# Altium PCB AMA4B_Core_board.PcbDoc (part 1 of 3)
Units mm, origin at the board's own origin, x right, y up, seen from the top; angles counter-clockwise.
Board outline 16 x 22 mm, 4 copper layers (TOP, LY2 - GND, LY3 - GND, BOTTOM), stack 0.771 mm thick; 43 components, 117 nets, 318 pads, 236 vias.
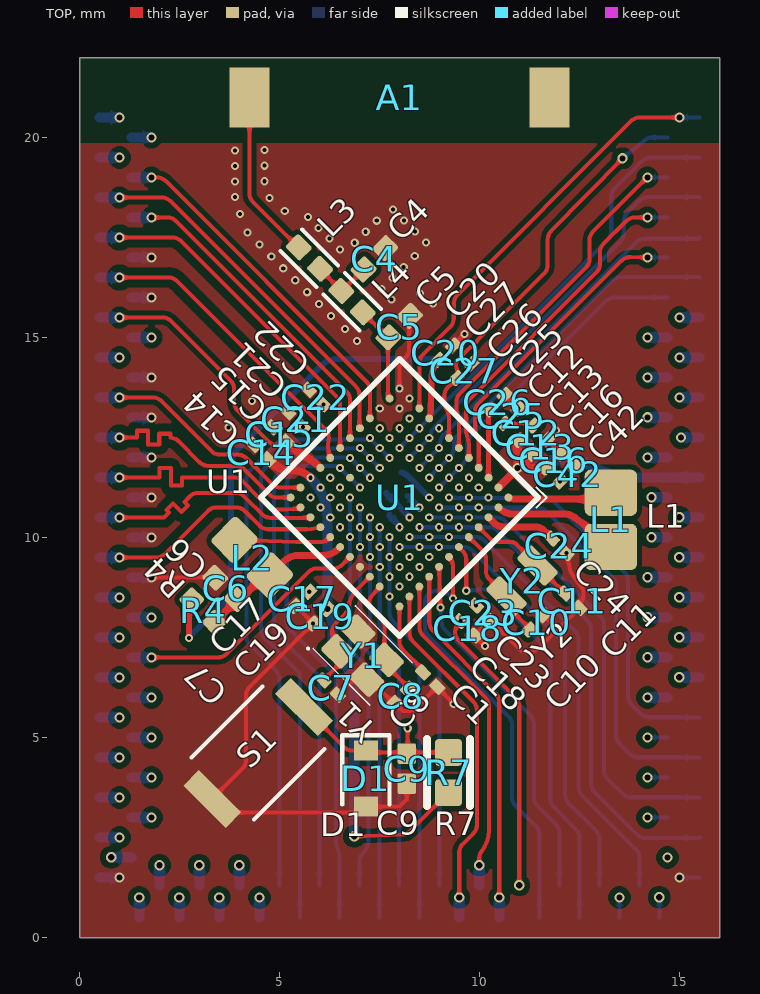
[diagram p0: TOP view]
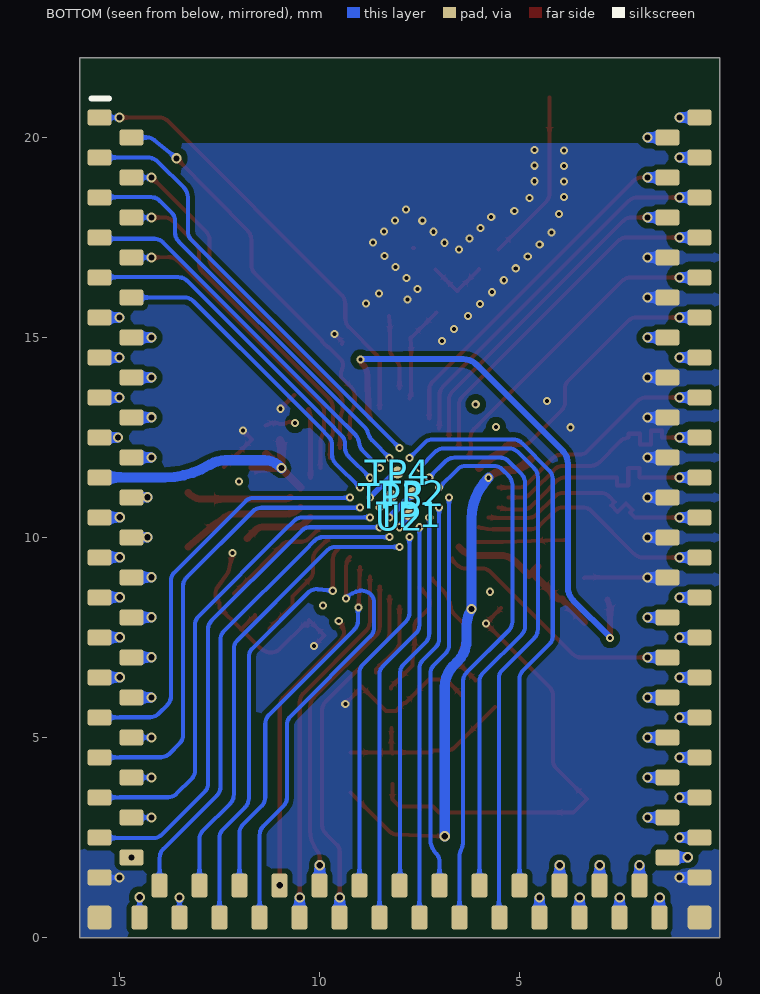
[diagram p1: BOTTOM view, seen from below]
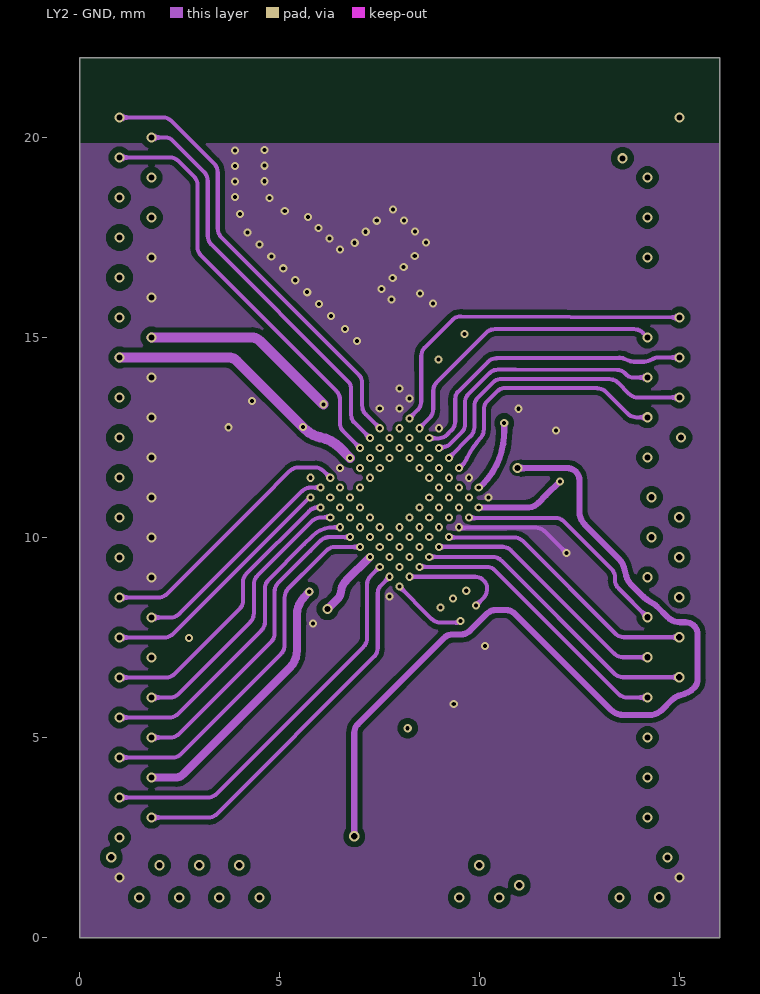
[diagram p2: LY2 - GND]
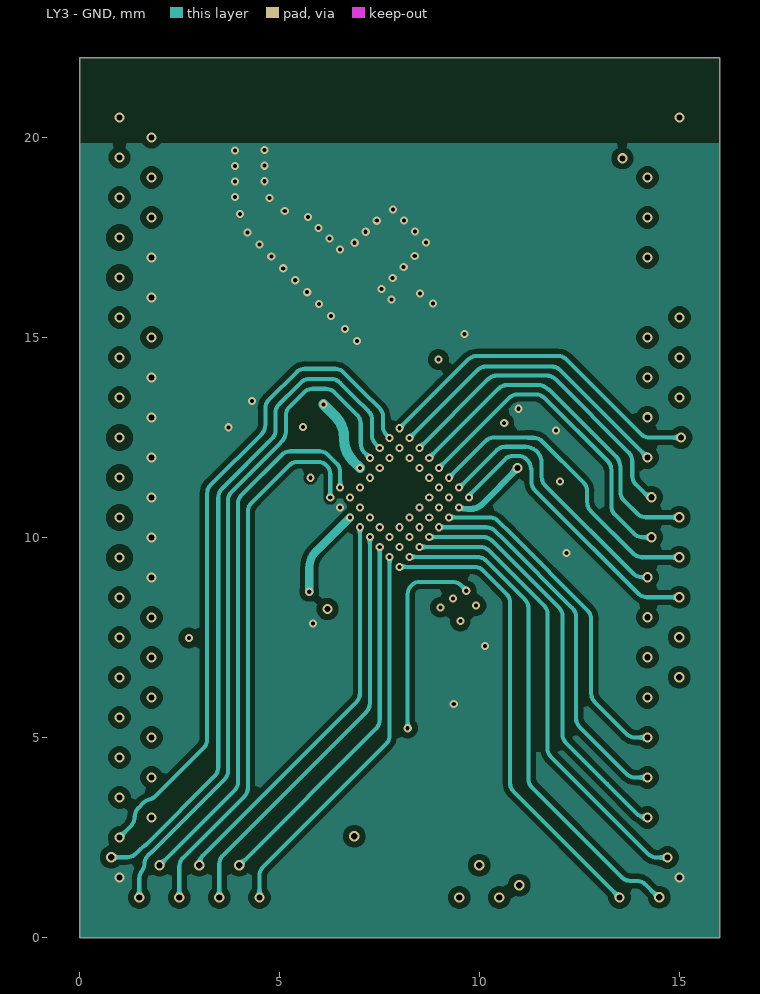
[diagram p3: LY3 - GND]

## Layer stack, top to bottom
Top Solder: solder mask 0.0432, Solder Resist, Dk 3.5
TOP: signal copper 0.035
Dielectric 2: prepreg 0.2104, PP-022, Dk 4.5
LY2 - GND: signal copper 0.0152
Dielectric2: core 0.25, Core-028, Dk 4.3
LY3 - GND: signal copper 0.0152
Dielectric 3: prepreg 0.2104, PP-022, Dk 4.5
BOTTOM: signal copper 0.035
Bottom Solder: solder mask 0.0432, Solder Resist, Dk 3.5

## Board outline
16,0 0,0 0,22 16,22

## Design rules (kind name [scope] priority, off if disabled: settings)
Clearance DIFFPAIR_CLEARANCE [InAnyDifferentialPair] p1: gap=0.127 ignorepadtopadclearanceinfootprint=TRUE except(0.152: Arc-Hole Track-Hole; 0.203: Arc-Poly Track-Poly SMDPad-Poly THPad-Poly Via-Poly Fill-Poly Poly-Poly)
Clearance APOLLOBGA_CLEARANCE [WithinRoom('ApolloBGA')] p2: gap=0.076 ignorepadtopadclearanceinfootprint=TRUE except(0.122: Arc-Fill Arc-Poly Arc-Region Track-Fill Track-Poly Track-Region; 0.127: Arc-THPad Arc-Hole Track-THPad Track-Hole)
Clearance [All] p3: gap=0.127 ignorepadtopadclearanceinfootprint=FALSE except(0.076: Arc-Fill Arc-Region Arc-Text Track-Text SMDPad-THPad SMDPad-Via SMDPad-Text THPad-THPad THPad-Via THPad-Text Via-Text Fill-Text Poly-Text Region-Text Text-Text Text-Hole; 0.152: Arc-Via Track-Via; 0.203: Arc-THPad Arc-Hole Track-THPad Track-Hole SMDPad-Hole THPad-Hole Via-Hole Fill-Hole Poly-Hole Region-Hole)
ComponentClearance [All] p1: gap=0 collisioncheckmode=3 verticalgap=0.254 showdistances=FALSE
DiffPairsRouting "Schematic Differential Pairs Routing" [InDifferentialPairClass('AP_USB')] p1: maxlimit=0.178 minlimit=0.127 mostfreqgap=0.152 toplayer_minwidth=0.076 toplayer_maxwidth=0.127 toplayer_prefwidth=0.102 midlayer1_minwidth=0.076 midlayer1_maxwidth=0.127 midlayer1_prefwidth=0.102 midlayer6_minwidth=0.076 midlayer6_maxwidth=0.127 midlayer6_prefwidth=0.102 bottomlayer_minwidth=0.076 bottomlayer_maxwidth=0.127 bottomlayer_prefwidth=0.102 maxuncoupledlength=12.7
FanoutControl Fanout_BGA [IsBGA] p1: bgadir=Out bgaviamode=Centered fanoutstyle=UnderPads fanoutdirection=Alternating viagrid=0.025 // Fanout_BGA (Default Rule)
HoleSize BlindViaHoleSize [InDrillLayerPair('TOP - LY4 - GND') OR InDrillLayerPair('TOP - LY3 - SIG') OR InDrillLayerPair('TOP - LY2 - GND') OR InDrillLayerPair('LY7 - GND - BOTTOM') OR InDrillLayerPair('LY6 - SIG - BOTTOM')] p1: absolutevalues=TRUE maxlimit=2.54 minlimit=0.1 maxpercent=80.000 minpercent=20.000
HoleSize [All] p2: absolutevalues=TRUE maxlimit=3.835 minlimit=0.076 maxpercent=80.000 minpercent=20.000
HoleToHoleClearance HoleToHoleClearance_1 [WithinRoom('ApolloBGA') OR WithinRoom('JLINKOB')] p1: gap=0.102 allowstackedmicrovias=TRUE
HoleToHoleClearance [All] p2: gap=0.254 allowstackedmicrovias=TRUE
MatchedLengths "Schematic Matched Net Lengths_8" [InDifferentialPairClass('MIPI_CLK')] p1: tolerance=2.54 checknetsindiffpair=FALSE checkdiffpairvsdiffpair=TRUE checkxsignals=TRUE checkothers=TRUE
MatchedLengths "Schematic Matched Net Lengths_5" [InDifferentialPairClass('MIPI_D0')] p2: tolerance=2.54 checknetsindiffpair=FALSE checkdiffpairvsdiffpair=TRUE checkxsignals=TRUE checkothers=TRUE
MatchedLengths "Schematic Matched Net Lengths_3" [InDifferentialPairClass('AP_USB')] p3: tolerance=2.54 checknetsindiffpair=FALSE checkdiffpairvsdiffpair=TRUE checkxsignals=TRUE checkothers=TRUE
MaxMinImpedance "Schematic Impedance Constraint_5" [InDifferentialPairClass('MIPI_D0')] p1: minimum=95.00 maximum=105.0
MaxMinImpedance "Schematic Impedance Constraint_4" [InDifferentialPairClass('MIPI_CLK')] p2: minimum=95.00 maximum=105.0
MaxMinImpedance "Schematic Impedance Constraint_1" [InDifferentialPairClass('AP_USB')] p3: minimum=85.00 maximum=95.00
MinimumSolderMaskSliver APOLLOBGA_MinimumSolderMaskSliver [WithinRoom('ApolloBGA') vs HasFootprint('bga131_0p35_4p7x4p7')] p1: minsoldermaskwidth=0.025
MinimumSolderMaskSliver [All] p2: minsoldermaskwidth=0.025
PlaneConnect [All] p1: planeconnectstyle=Direct reliefexpansion=0.508 reliefentries=4 reliefconductorwidth=0.254 reliefairgap=0.254
PolygonConnect [All] p1: thpad.connectstyle=Relief thpad.reliefconductorwidth=0.254 thpad.reliefentries=4 thpad.polygonreliefangle="90 Angle" thpad.airgapwidth=0.254 smdpad.connectstyle=Direct smdpad.reliefconductorwidth=0.254 smdpad.reliefentries=4 smdpad.polygonreliefangle="90 Angle" smdpad.airgapwidth=0.127 via.connectstyle=Direct via.reliefconductorwidth=0.254 via.reliefentries=4 via.polygonreliefangle="90 Angle" via.airgapwidth=0.254
RoomDefinition ApolloBGA [InComponentClass('ApolloBGA')] p1: confinementstyle=ConfineIn formatcopy=TRUE lockcomponents=FALSE outline 8.07,7.357 4.427,11 8.07,14.643 11.712,11
RoutingVias [All] p1: holewidth=0.102 width=0.203 viastyle="Through Hole" minholewidth=0.076 minwidth=0.152 maxholewidth=0.635 maxwidth=1.27
RoutingVias APOLLOBGA_RoutingVias [WithinRoom('ApolloBGA')] p2: holewidth=0.102 width=0.203 viastyle="Through Hole" minholewidth=0.076 minwidth=0.152 maxholewidth=0.635 maxwidth=1.27
SilkToSilkClearance [All] p1: silktosilkclearance=0
SilkToSolderMaskClearance [IsPad] p1: minsilkscreentomaskgap=0 clearancetoexposedcopper=FALSE
SolderMaskExpansion [All] p1: expansion=0.05 istentingtop=FALSE
UnRoutedNet [All] p1: checkbadconnections=TRUE
ViasUnderSMD [All] p1: allowed=TRUE
Width [All] p1: maxlimit=1.27 minlimit=0.076 preferedwidth=0.152 midlayer1_maxwidth=0.508 midlayer6_maxwidth=0.508 bottomlayer_maxwidth=0.508 minimp=50.000000 maximp=50.000000 favimp=50.000000
Width APOLLOBGA_WIDTH [WithinRoom('ApolloBGA')] p2: maxlimit=0.508 minlimit=0.076 preferedwidth=0.102 midlayer1_prefwidth=0.089 midlayer6_prefwidth=0.089 minimp=50.000000 maximp=50.000000 favimp=50.000000
20 further rules are at their usual default settings.

## Classes and differential pairs
net class MIPI: MIPI_CLK.MIPI_N MIPI_CLK.MIPI_P MIPI_D0.MIPI_N MIPI_D0.MIPI_P
component class GPIO: TP1 TP2 TP3 TP4 U2
differential pair class MIPI_D0: MIPI_D0.MIPI
differential pair class MIPI_CLK: MIPI_CLK.MIPI
differential pair class AP_USB: AP4_USB
component class Apollo4B: A1 C1 C4 C5 C6 C7 C8 C9 C10 C11 C12 C13 C14 C15 C16 C17 C18 C19 C20 C21 C22 C23 C24 C25 C26 C27 C42 D1 L1 L2 L3 L4 R4 R7 S1 U1 Y1 Y2
differential pair MIPI_D0.MIPI: +MIPI_D0.MIPI_P -MIPI_D0.MIPI_N
differential pair MIPI_CLK.MIPI: +MIPI_CLK.MIPI_P -MIPI_CLK.MIPI_N
differential pair AP4_USB: +AP4_USB_P -AP4_USB_N

## Components (designator, comment, footprint, x,y, rotation, side; value= is the part's Value field where it differs from the comment)
A1 "MIFA Antenna" ANT-2.4GHZ-8.0X1.0MM 8,21 r0 top
C1 "100nF" IPC_B 8.765,6.45 r315 top
C4 "1.5pF" IPC_C_2 7.371,16.969 r45 top
C5 "2pF" IPC_C_2 7.993,15.272 r45 top
C6 "4.7uF" IPC_C_2 3.66,8.726 r135 top
C7 "4pF" IPC_C#1 6.279,6.249 r315 top
C8 "4pF" IPC_C#1 8.031,6.043 r225 top
C9 "4.7nF" IPC_C#2 8.18,4.22 r270 top
C10 "6pF" IPC_C#1 11.428,7.879 r45 top
C11 "6pF" IPC_C#1 12.316,8.422 r315 top
C12 "2.2uF" IPC_C#1 11.168,12.618 r45 top
C13 "1uF" IPC_C#1 11.513,12.272 r45 top
C14 "1uF" IPC_C#1 4.538,12.138 r135 top
C15 "1uF" IPC_C#1 5.001,12.576 r135 top
C16 "1uF" IPC_C#1 11.858,11.927 r45 top
C17 "2.2uF" IPC_C#1 5.563,8.464 r225 top
C18 "2.2uF" IPC_C#1 9.7,7.731 r315 top
C19 "2.2uF" IPC_C#1 6.021,8.032 r225 top
C20 "1uF" IPC_C#1 9.16,14.622 r45 top
C21 "2.2uF" IPC_C#1 5.4,12.953 r135 top
C22 "2.2uF" IPC_C#1 5.909,13.513 r135 top
C23 "2.2uF" IPC_C#1 10.088,8.12 r315 top
C24 "2.2uF" IPC_C#1 11.992,9.792 r315 top
C25 "2.2uF" IPC_C#1 10.797,13.039 r45 top
C26 "2.2uF" IPC_C#1 10.452,13.384 r45 top
C27 "2.2uF" IPC_C#1 9.616,14.166 r45 top
C42 "2.2uF" IPC_C#1 12.204,11.582 r45 top
D1 "PESD5V0X1UB,135" SC79 7.16,3.973 r270 top
L1 "2.2uH" IPC_C#3 13.283,10.442 r270 top
L2 "1uH" IPC_B_2 4.319,9.497 r45 top
L3 "2.2nH" IPC_C_4 5.747,16.985 r315 top
L4 "2nH" IPC_C_4 6.813,15.896 r315 top
R4 "0 Ω" IPC_C#4 3.089,8.165 r315 top
R7 "100kΩ" IPC_A 9.225,4.125 r270 top
S1 "TS2306A-240GF-MSM-9_C388290" TS2306A240GFMSM9_C388290 4.465,4.611 r225 top
TP1 "PAD" TPPAD_0.5MM 7.752,10.573 r90 bottom
TP2 "PAD" TPPAD_0.5MM 7.666,11.109 r90 bottom
TP3 "PAD" TPPAD_0.5mm 8.204,11.038 r90 bottom
TP4 "PAD" TPPAD_0.5mm 8.05,11.624 r90 bottom
U1 "APOLLO4BPKBR" BGA131_0P35_4P7X4P7 8,11 r225 top locked
U2 "AMAP42KP-KBR" APOLLO_4B 8,10.5 r180 bottom locked
Y1 "32MHz" XOSC_ABM12W_1.2X1.6 7.076,7.05 r135 top
Y2 "32.768kHz" XTAL2-1P6X1P0-SM 11.064,8.915 r45 top

## Footprints (in the part's own frame and the unit in brackets; to place one, negate y for a bottom-side part, rotate by r counter-clockwise, add the part's x,y. Pads: shape width x height; smd on the part's side, far side on the other; paste and mask are expansions set on the pad)
ANT-2.4GHZ-8.0X1.0MM [mm] "ANT-2.4GHZ-8.0X1.0MM"
  rect 1x1.5 smd: 1(-3.75,0) NC(3.75,0)
  body extent -4.85,-1 4.65,1.1, height 1
APOLLO_4B [mm]
  rrect30% 0.6x0.4 smd: 0(-7.5,10) 1(-6.7,9.5) 2(-7.5,9) 3(-6.7,8.5) 4(-7.5,8) 5(-6.7,7.5) 6(-7.5,7) 7(-6.7,6.5) 8(-7.5,6) 9(-6.7,5.5) 10(-7.5,5) 11(-6.7,4.5) 12(-7.5,4) 13(-6.7,3.5) 14(-7.5,3) 15(-6.7,2.5) 16(-7.5,2) 17(-6.7,1.5) 18(-7.5,1) 19(-6.7,0.5) 20(-7.5,0) 21(-6.7,-0.5) 22(-7.5,-1) 23(-6.7,-1.5) 24(-7.5,-2) 25(-6.7,-2.5) 26(-7.5,-3) 27(-6.7,-3.5) 28(-7.5,-4) 29(-6.7,-4.5) 30(-7.5,-5) 31(-6.7,-5.5) 32(-7.5,-6) 33(-6.7,-6.5) 34(-7.5,-7) 35(-6.7,-7.5) 36(-7.5,-8) 37(-6.7,-8.5) 38(-7.5,-9) 68(7.5,-9) 69(6.7,-8.5) 70(7.5,-8) 71(6.7,-7.5) 72(7.5,-7) 73(6.7,-6.5) 74(7.5,-6) 75(6.7,-5.5) 76(7.5,-5) 77(6.7,-4.5) 78(7.5,-4) 79(6.7,-3.5) 80(7.5,-3) 81(6.7,-2.5) 82(7.5,-2) 83(6.7,-1.5) 84(7.5,-1) 85(6.7,-0.5) 86(7.5,0) 87(6.7,0.5) 88(7.5,1) 89(6.7,1.5) 90(7.5,2) 91(6.7,2.5) 92(7.5,3) 93(6.7,3.5) 94(7.5,4) 95(6.7,4.5) 96(7.5,5) 97(6.7,5.5) 98(7.5,6) 99(6.7,6.5) 100(7.5,7) 101(6.7,7.5) 102(7.5,8) 103(6.7,8.5) 104(7.5,9) 105(6.7,9.5) 106(7.5,10)
  rrect30% 0.6x0.6 smd: 39(-7.5,-10) 67(7.5,-10)
  rrect30% 0.4x0.6 smd: 40(-6.5,-10) 41(-6,-9.2) 42(-5.5,-10) 43(-5,-9.2) 44(-4.5,-10) 45(-4,-9.2) 46(-3.5,-10) 47(-3,-9.2) 48(-2.5,-10) 49(-2,-9.2) 50(-1.5,-10) 51(-1,-9.2) 52(-0.5,-10) 53(0,-9.2) 54(0.5,-10) 55(1,-9.2) 56(1.5,-10) 57(2,-9.2) 58(2.5,-10) 59(3,-9.2) 60(3.5,-10) 61(4,-9.2) 62(4.5,-10) 63(5,-9.2) 64(5.5,-10) 65(6,-9.2) 66(6.5,-10)
BGA131_0P35_4P7X4P7 [mm] "BGA131_0P35_4P7X4P7"
  round 0.2 smd mask+0.03: A1(-1.925,1.925) A2(-1.575,1.925) A3(-1.225,1.925) A4(-0.875,1.925) A5(-0.525,1.925) A6(-0.175,1.925) A7(0.175,1.925) A8(0.525,1.925) A9(0.875,1.925) A10(1.225,1.925) A11(1.575,1.925) A12(1.925,1.925) B1(-1.925,1.575) B2(-1.575,1.575) B3(-1.225,1.575) B4(-0.875,1.575) B5(-0.525,1.575) B6(-0.175,1.575) B7(0.175,1.575) B8(0.525,1.575) B9(0.875,1.575) B10(1.225,1.575) B11(1.575,1.575) B12(1.925,1.575) C1(-1.925,1.225) C2(-1.575,1.225) C3(-1.225,1.225) C4(-0.875,1.225) C5(-0.525,1.225) C6(-0.175,1.225) C7(0.175,1.225) C8(0.525,1.225) C9(0.875,1.225) C10(1.225,1.225) C11(1.575,1.225) C12(1.925,1.225) D1(-1.925,0.875) D2(-1.575,0.875) D3(-1.225,0.875) D4(-0.875,0.875) D5(-0.525,0.875) D6(-0.175,0.875) D7(0.175,0.875) D8(0.525,0.875) D9(0.875,0.875) D10(1.225,0.875) D11(1.575,0.875) D12(1.925,0.875) E1(-1.925,0.525) E2(-1.575,0.525) E3(-1.225,0.525) E4(-0.875,0.525) E5(-0.525,0.525) E6(-0.175,0.525) E7(0.175,0.525) E8(0.525,0.525) E9(0.875,0.525) E10(1.225,0.525) E11(1.575,0.525) E12(1.925,0.525) F1(-1.925,0.175) F2(-1.575,0.175) F3(-1.225,0.175) F4(-0.875,0.175) F9(0.875,0.175) F10(1.225,0.175) F11(1.575,0.175) F12(1.925,0.175) G1(-1.925,-0.175) G2(-1.575,-0.175) G3(-1.225,-0.175) G4(-0.875,-0.175) G9(0.875,-0.175) G10(1.225,-0.175) G11(1.575,-0.175) G12(1.925,-0.175) H1(-1.925,-0.525) H2(-1.575,-0.525) H3(-1.225,-0.525) H4(-0.875,-0.525) H9(0.875,-0.525) H10(1.225,-0.525) H11(1.575,-0.525) H12(1.925,-0.525) J1(-1.925,-0.875) J2(-1.575,-0.875) J3(-1.225,-0.875) J4(-0.875,-0.875) J5(-0.525,-0.875) J6(-0.175,-0.875) J7(0.175,-0.875) J8(0.525,-0.875) J9(0.875,-0.875) J10(1.225,-0.875) J11(1.575,-0.875) J12(1.925,-0.875) K1(-1.925,-1.225) K2(-1.575,-1.225) K3(-1.225,-1.225) K4(-0.875,-1.225) K5(-0.525,-1.225) K6(-0.175,-1.225) K7(0.175,-1.225) K8(0.525,-1.225) K9(0.875,-1.225) K10(1.225,-1.225) K11(1.575,-1.225) K12(1.925,-1.225) L1(-1.925,-1.575) L2(-1.575,-1.575) L4(-0.875,-1.575) L5(-0.525,-1.575) L6(-0.175,-1.575) L7(0.175,-1.575) L8(0.525,-1.575) L9(0.875,-1.575) L10(1.225,-1.575) L11(1.575,-1.575) L12(1.925,-1.575) M1(-1.925,-1.925) M2(-1.575,-1.925) M3(-1.225,-1.925) M4(-0.875,-1.925) M5(-0.525,-1.925) M6(-0.175,-1.925) M7(0.175,-1.925) M8(0.525,-1.925) M9(0.875,-1.925) M10(1.225,-1.925) M11(1.575,-1.925) M12(1.925,-1.925)
  silkscreen extent -2.6,-2.45 2.45,2.6, body extent -2.45,-2.45 2.45,2.45, height 0.5
IPC_A [mm]
  rrect25% 0.668x0.672 smd mask+0.051: 1(-0.502,0) 2(0.502,0)
  silkscreen extent -0.83,-0.54 0.84,0.54, body extent -0.53,-0.27 0.53,0.28, height 0.4
IPC_B [mm]
  rrect25% 0.354x0.263 smd mask+0.025: 1(-0.254,0) 2(0.254,0)
  body extent -0.31,-0.17 0.32,0.16, height 0.33
IPC_B_2 [mm]
  rrect25% 0.906x0.855 smd paste+0 mask+0: 1(0,0.626) 2(0,-0.626)
  body extent -0.6,-1.15 0.6,1.15, height 0.25
IPC_C#1 [mm]
  rrect25% 0.354x0.263 smd mask+0.025: 1(-0.254,0) 2(0.254,0)
  body extent -0.31,-0.17 0.32,0.16, height 0.33
IPC_C#2 [mm]
  rrect25% 0.515x0.472 smd mask+0.051: 1(-0.379,0) 2(0.379,0)
  body extent -0.74,-0.38 0.74,0.38, height 0.25
IPC_C#3 [mm]
  rrect25% 1.154x1.306 smd mask+0.051: 1(-0.676,0) 2(0.676,0)
  body extent -1.35,-0.8 1.35,0.8, height 0.25
IPC_C#4 [mm]
  rrect25% 0.468x0.472 smd mask+0.051: 1(-0.402,0) 2(0.402,0)
  body extent -0.53,-0.27 0.53,0.28, height 0.4
IPC_C_2 [mm]
  rrect25% 0.515x0.472 smd mask+0.051: 1(-0.379,0) 2(0.379,0)
  body extent -0.5,-0.25 0.5,0.25, height 0.55
IPC_C_4 [mm]
  rrect25% 0.515x0.472 smd paste+0 mask+0.05: 1(-0.379,0) 2(0.379,0)
  silkscreen extent -0.64,-0.38 0.64,0.38, body extent -0.74,-0.38 0.74,0.38, height 0.25
SC79 [mm] "SC79"
  rect 0.5x0.6 smd paste-0.05 mask+0.05: 1(-0.7,0) 2(0.7,0)
  silkscreen extent -1.08,-0.59 0.65,0.59
TPPAD_0.5MM [mm] "A 1.5mm Copper Pad Testpoint"
  round 0.3 smd paste-0.75: TP(0,0)
TPPAD_0.5mm [mm] "A 1.5mm Copper Pad Testpoint"
  round 0.3 smd paste-0.75: TP(0,0)
TS2306A240GFMSM9_C388290 [mm]
  rect 0.55x1.5 smd: 1(-1.625,0) 2(1.625,0)
  silkscreen extent -1.25,-1.1 1.25,1.1, body extent -1.84,-1.1 1.84,1.1, height 1.1
XOSC_ABM12W_1.2X1.6 [mm] "Footprint for the ABM12W series of Xtal oscilators"
  rrect25% 0.73x0.58 smd mask+0.03: 1(0.5,0.35) 2(-0.5,0.35) 3(-0.5,-0.35) 4(0.5,-0.35)
  silkscreen extent -1,-0.75 1.11,0.87, body extent -0.8,-0.6 0.8,0.6, height 0.4
XTAL2-1P6X1P0-SM [mm] "XTAL2-1P6X1P0-SM"
  rrect25% 0.5x1.001 smd: 1(-0.549,0) 2(0.549,0)
  body extent -0.8,-0.5 0.8,0.5, height 0.4

## Part data
A1: library part "Ceramic _ANTENNA", "None", AMBIQ PN=PCB_ANTENNA
C1: library part Capacitor, "NONE", Capacitance=2.2uF, Case Code (Imperial)=0201, Case Code (Metric)=0603, Dielectric=X5R, Manufacturer=Murata, Manufacturer Part Number=GRM033R61A225KE47D, Max Operating Temperature=85°C, Min Operating Temperature=-55°C, Tolerance=10%, Voltage Rating=10V, AMBIQ PN=GRM033R61A225KE47D, Case/Package=0201, Category="Ceramic Capacitors", ComponentLink1Description=http://search.murata.co.jp/Ceramy/image/img/A01X/G101/ENG/GRM033R61A225KE47-01.pdf?src-supplier=Digi-Key, ComponentLink1URL=http://search.murata.co.jp/Ceramy/image/img/A01X/G101/ENG/GRM033R61A225KE47-01.pdf?src-supplier=Digi-Key, Length=0.024inch, Mount="Surface Mount", Packaging="Tape and Reel", Pricing 1="1=0.27590, 10=0.23000, 25=0.18010, 100=0.10000, 250=0.09900, 500=0.06860, 1000=0.06790, 3000=0.06720, 6000=0.05140, 15000=0.050", RoHS=Yes, RoHS Compliant=Yes, Stock 1=990, Supplier 1="Arrow Electronics", Supplier Part Number 1=GRM033R61A225KE47D, Thickness=0.015inch, Voltage Rating (DC)=10V, Width=0.012inch
C4: library part Capacitor, "NONE", Case Code (Imperial)=0402, Case Code (Metric)=1005, Manufacturer=Murata, Manufacturer Part Number=GRM1555C1H1R5CA01D, AMBIQ PN=GRM1555C1H1R5CA01D, Capacitance=1.5pF, Case/Package=0402, Category="Ceramic Capacitors", Mount="Surface Mount", Mounting Technology="Surface Mount", Pricing 1="10000=0.00487, 20000=0.00476, 40000=0.00465 (USD)", RoHS=Yes, Stock 1=20000, Supplier 1=Avnet, Supplier Part Number 1=GRM1555C1H1R5CA01D
C5: library part Capacitor, "NONE", Case Code (Imperial)=0402, Case Code (Metric)=1005, Dielectric=C0G, Manufacturer=Murata, Manufacturer Part Number=GRM1555C1H2R0WA01D, Tolerance=1%, AMBIQ PN=GRM1555C1H2R0WA01D, Capacitance=2pF, Case/Package=0402, Category="Ceramic Capacitors", Mount="Surface Mount", Pricing 1="1=0.10000, 10=0.05720, 25=0.05660, 100=0.03540, 250=0.03000 (USD)", RoHS=Yes, Stock 1=54, Supplier 1="Arrow Electronics", Supplier Part Number 1=GRM1555C1H2R0WA01D
C6: library part Capacitor, "NONE", Case Code (Imperial)=0402, Case Code (Metric)=1005, Dielectric=X5R, Manufacturer=Murata, Manufacturer Part Number=GRM155R60G475ME87D, Max Operating Temperature=85°C, Min Operating Temperature=-55°C, Tolerance=20%, Voltage=4V, AMBIQ PN=GRM155R60G475ME87D, Capacitance=4.7uF, Case/Package=0402, Category="Ceramic Capacitors", ComponentLink1Description=https://datasheet.ciiva.com/11613/c02e-11613181.pdf?src-supplier=Avnet, ComponentLink1URL=https://datasheet.ciiva.com/11613/c02e-11613181.pdf?src-supplier=Avnet, Construction=Flat, Depth=0.5mm, Height=0.5mm, Lead Free="Lead Free", Length=1mm, Mount="Surface Mount", Packaging="Tape and Reel", Pricing 1="1=0.12440, 10=0.07530, 25=0.07460, 100=0.04310, 250=0.04270, 500=0.02940, 1000=0.02580, 3000=0.02370, 6000=0.02210, 15000=0.021", Radiation Hardening=No, REACH SVHC="No SVHC", RoHS=Yes, RoHS Compliant=Yes, Series=GRM, Stock 1=79890, Supplier 1="Arrow Electronics", Supplier Part Number 1=GRM155R60G475ME87D, Thickness=0.026inch, Voltage Rating=4V, Voltage Rating (DC)=4V, Width=0.02inch
C7 C8: library part Capacitor, "NONE", Case Code (Imperial)=0201, Case Code (Metric)=0603, Dielectric=C0G, Manufacturer=Murata, Manufacturer Part Number=GRM0335C1H4R0BA01D, Max Operating Temperature=125°C, Min Operating Temperature=-55°C, Package Quantity=15000, Voltage Rating=50V, AMBIQ PN=GRM0335C1H4R0BA01D, Capacitance=4pF, Case/Package=0201, Category="Ceramic Capacitors", ComponentLink1Description=http://www.mouser.com/ds/2/281/c02e-2905.pdf?src-supplier=Mouser, ComponentLink1URL=http://www.mouser.com/ds/2/281/c02e-2905.pdf?src-supplier=Mouser, Depth=0.3mm, Height=0.3mm, Length=0.6mm, Mount="Surface Mount", Packaging="Tape and Reel", Pricing 1="1=0.09680, 10=0.01620, 25=0.01560, 100=0.00890, 250=0.00860, 500=0.00620, 3000=0.00530 (USD)", RoHS=Yes, Series=GRM, Stock 1=3508, Supplier 1="Arrow Electronics", Supplier Part Number 1=GRM0335C1H4R0BA01D, Termination=SMD/SMT, Thickness=0.013inch, Voltage Rating (DC)=50V, Width=0.012inch
C9: library part Capacitor, "NONE", Case Code (Imperial)=0402, Case Code (Metric)=1005, Dielectric=X5R, Manufacturer=Murata, Manufacturer Part Number=GRM155R61C472KA01D, Max Operating Temperature=85°C, Min Operating Temperature=-55°C, Package Quantity=10000, Tolerance=10%, Voltage Rating=16V, AMBIQ PN=GRM155R61C472KA01D, Capacitance=4.7nF, Case/Package=0402, Category="Ceramic Capacitors", ComponentLink1Description=https://datasheet.ciiva.com/11620/product-11620403.pdf?src-supplier=Avnet, ComponentLink1URL=https://datasheet.ciiva.com/11620/product-11620403.pdf?src-supplier=Avnet, Construction=Flat, Depth=0.5mm, Height=0.5mm, Length=1mm, Mount="Surface Mount", Packaging="Tape and Reel", Pricing 1="1=0.07090 (USD)", Radiation Hardening=No, RoHS=Yes, RoHS Compliant=Yes, Series=GRM, Stock 1=3, Supplier 1="Arrow Electronics", Supplier Part Number 1=GRM155R61C472KA01D, Termination=SMD/SMT, Thickness=0.022inch, Voltage Rating (DC)=16V, Width=0.02inch
C10 C11: library part Capacitor, "NONE", Case Code (Imperial)=0201, Case Code (Metric)=0603, Dielectric=C0G, Manufacturer=Murata, Manufacturer Part Number=GRM0335C1H6R0BA01D, Max Operating Temperature=125°C, Min Operating Temperature=-55°C, Package Quantity=15000, Voltage Rating=50V, AMBIQ PN=GRM0335C1H6R0BA01D, Capacitance=6pF, Case/Package=0201, Category="Ceramic Capacitors", ComponentLink1Description=http://www.mouser.com/ds/2/281/c02e-2905.pdf?src-supplier=Mouser, ComponentLink1URL=http://www.mouser.com/ds/2/281/c02e-2905.pdf?src-supplier=Mouser, Height=0.3mm, Length=0.024inch, Mount="Surface Mount", Packaging="Tape and Reel", Pricing 1="1=0.06400, 10=0.01810, 25=0.01250, 100=0.00850, 250=0.00840, 500=0.00620, 1000=0.00510, 3000=0.00460 (USD)", RoHS=Yes, RoHS Compliant=Yes, Series=GRM, Stock 1=4052, Supplier 1="Arrow Electronics", Supplier Part Number 1=GRM0335C1H6R0BA01D, Termination=SMD/SMT, Thickness=0.013inch, Voltage Rating (DC)=50V, Width=0.012inch
C12 C17 C18 C19 C21 C22 C23 C24 C25 C26 C27 C42: library part Capacitor, "NONE", Case Code (Imperial)=0201, Case Code (Metric)=0603, Dielectric=X5R, Manufacturer=Murata, Manufacturer Part Number=GRM033R61A225KE47D, Max Operating Temperature=85°C, Min Operating Temperature=-55°C, Tolerance=10%, Voltage Rating=10V, AMBIQ PN=GRM033R61A225KE47D, Capacitance=2.2uF, Case/Package=0201, Category="Ceramic Capacitors", ComponentLink1Description=http://search.murata.co.jp/Ceramy/image/img/A01X/G101/ENG/GRM033R61A225KE47-01.pdf?src-supplier=Digi-Key, ComponentLink1URL=http://search.murata.co.jp/Ceramy/image/img/A01X/G101/ENG/GRM033R61A225KE47-01.pdf?src-supplier=Digi-Key, Length=0.024inch, Mount="Surface Mount", Packaging="Tape and Reel", Pricing 1="1=0.27590, 10=0.23000, 25=0.18010, 100=0.10000, 250=0.09900, 500=0.06860, 1000=0.06790, 3000=0.06720, 6000=0.05140, 15000=0.050", RoHS=Yes, RoHS Compliant=Yes, Stock 1=990, Supplier 1="Arrow Electronics", Supplier Part Number 1=GRM033R61A225KE47D, Thickness=0.015inch, Voltage Rating (DC)=10V, Width=0.012inch
C13 C14 C15 C16 C20: library part Capacitor, "NONE", Case Code (Imperial)=0201, Case Code (Metric)=0603, Dielectric=X5R, Manufacturer=Murata, Manufacturer Part Number=GRM033R61A105ME15D, Max Operating Temperature=85°C, Min Operating Temperature=-55°C, Tolerance=20%, Voltage Rating=10V, AMBIQ PN=GRM033R61A105ME15D, Capacitance=1uF, Case/Package=0201, Category="Ceramic Capacitors", ComponentLink1Description=http://search.murata.co.jp/Ceramy/image/img/A01X/G101/ENG/GRM033R61A105ME15-01.pdf?src-supplier=Digi-Key, ComponentLink1URL=http://search.murata.co.jp/Ceramy/image/img/A01X/G101/ENG/GRM033R61A105ME15-01.pdf?src-supplier=Digi-Key, Length=0.024inch, Mount="Surface Mount", Packaging="Tape and Reel", Pricing 1="1=0.35440, 10=0.26860, 25=0.26600, 50=0.24050, 100=0.18220, 250=0.18020, 500=0.17800, 1000=0.12040, 3000=0.11920, 6000=0.08160,", RoHS=Yes, RoHS Compliant=Yes, Stock 1=387591, Supplier 1="Arrow Electronics", Supplier Part Number 1=GRM033R61A105ME15D, Thickness=0.015inch, Voltage Rating (DC)=10V, Width=0.012inch
D1: "None", Manufacturer=Nexperia, Supplier Part Number 1=1704867, AMBIQ PN=PESD5V0X1UB,135, Category="ESD and Circuit Protection ICs", ComponentLink1Description=https://www.mouser.com/ds/2/302/PESD5V0X1UB-1151612.pdf?src-supplier=Mouser, ComponentLink1URL=https://www.mouser.com/ds/2/302/PESD5V0X1UB-1151612.pdf?src-supplier=Mouser, Manufacturer Part Number=PESD5V0X1UB,135, Pricing 1="10000=0.12700 (USD)", RoHS=Yes, RoHS Compliant=Yes, Stock 1=1, Supplier 1=RSComponents
L1: library part Inductor, "NONE", Case/Package=0805, Manufacturer=Murata, Manufacturer Part Number=DFE201210U-2R2M=P2, AMBIQ PN=DFE201210U-2R2M=P2, Category="Fixed Inductors", ComponentLink1Description=http://search.murata.co.jp/Ceramy/image/img/P02/J(E)TE243A-0029_DFE201210U_reference.pdf?src-supplier=Digi-Key, ComponentLink1URL=http://search.murata.co.jp/Ceramy/image/img/P02/J(E)TE243A-0029_DFE201210U_reference.pdf?src-supplier=Digi-Key, Pricing 1="1=0.40140, 10=0.29940, 25=0.27320, 100=0.22140 (USD)", RoHS=Yes, RoHS Compliant=Yes, Stock 1=206, Supplier 1="Arrow Electronics", Supplier Part Number 1=DFE201210U-2R2M=P2
L2: library part Inductor, "NONE", Case Code (Imperial)=0603, Case Code (Metric)=1608, Current Rating=1.6A, DC Resistance (DCR)=144mR, Manufacturer=Murata, Manufacturer Part Number=DFE18SAN1R0ME0L, Max Operating Temperature=85°C, Min Operating Temperature=-40°C, Saturation Current=2A, Test Frequency=1MHz, Tolerance=20%, AMBIQ PN=DFE18SAN1R0ME0L, Case/Package=0603, Category="Fixed Inductors", ComponentLink1Description=http://www.farnell.com/datasheets/2616752.pdf?src-supplier=Farnell, ComponentLink1URL=http://www.farnell.com/datasheets/2616752.pdf?src-supplier=Farnell, ComponentLink2Description=http://search.murata.co.jp/Ceramy/image/img/P02/JETE243A-0037.pdf?src-supplier=Digi-Key, ComponentLink2URL=http://search.murata.co.jp/Ceramy/image/img/P02/JETE243A-0037.pdf?src-supplier=Digi-Key, ComponentLink3Description=http://www.farnell.com/datasheets/2616752.pdf?src-supplier=Newark, ComponentLink3URL=http://www.farnell.com/datasheets/2616752.pdf?src-supplier=Newark, ComponentLink4Description=http://www.farnell.com/datasheets/2616752.pdf?src-supplier=Element14, ComponentLink4URL=http://www.farnell.com/datasheets/2616752.pdf?src-supplier=Element14, Core Material=Metal, Inductance=1uH, Mount="Surface Mount", Packaging="Cut Tape", Pricing 1="3000=0.16860 (USD)", RoHS=Yes, RoHS Compliant=Yes, Shielding=Shielded, Stock 1=21000, Supplier 1="Arrow Electronics", Supplier Part Number 1=DFE18SAN1R0ME0L
L3: library part Inductor, "NONE", Case Code (Imperial)=0402, Case Code (Metric)=1005, Current Rating=220mA, DC Resistance (DCR)=300mR, Manufacturer=Murata, Manufacturer Part Number=LQP15MN2N2B02D, Max Operating Temperature=85°C, Min Operating Temperature=-40°C, Package Quantity=10000, Resistor Type="Thin Film", Self Resonant Frequency=6GHz, Test Frequency=500MHz, AMBIQ PN=LQP15MN2N2B02D, Case/Package=0402, Category="Fixed Inductors", ComponentLink1Description=https://datasheet.ciiva.com/11801/0900766b80f155d9-11801394.pdf?src-supplier=RSComponents, ComponentLink1URL=https://datasheet.ciiva.com/11801/0900766b80f155d9-11801394.pdf?src-supplier=RSComponents, ComponentLink2Description=https://datasheet.ciiva.com/1039/l0075s0084lqp15m-1039847.pdf?src-supplier=Digi-Key, ComponentLink2URL=https://datasheet.ciiva.com/1039/l0075s0084lqp15m-1039847.pdf?src-supplier=Digi-Key, ComponentLink3Description=https://datasheet.ciiva.com/1039/l0075s0084lqp15m-1039846.pdf?src-supplier=Digi-Key, ComponentLink3URL=https://datasheet.ciiva.com/1039/l0075s0084lqp15m-1039846.pdf?src-supplier=Digi-Key, ComponentLink4Description=https://datasheet.ciiva.com/1039/l0075s0084lqp15m-1039848.pdf?src-supplier=Digi-Key, ComponentLink4URL=https://datasheet.ciiva.com/1039/l0075s0084lqp15m-1039848.pdf?src-supplier=Digi-Key, Core Material=Non-Magnetic, DC Current=220mA, Depth=0.6mm, Height=0.35mm, Height - Seated (Max)=0.018inch, Inductance=2.2nH, Lead Free="Lead Free", Length=1.1mm, Max DC Current=220mA, Military Standard=Not, Mount="Surface Mount", Packaging="Tape and Reel", Pricing 1="10000=0.04609, 20000=0.04476, 40000=0.04342 (USD)", Q Factor=13, Radiation Hardening=No, Rated Current-Max=220mA, RoHS=Yes, RoHS Compliant=Yes, Series=LQP15M, Shielding=Unshielded, Supplier 1=Avnet, Supplier Part Number 1=LQP15MN2N2B02D, Technology="THIN FILM", Termination=SMD/SMT, Width=0.02inch
L4: library part Inductor, "NONE", Case Code (Imperial)=0402, Case Code (Metric)=1005, Current=130mA, Current Rating=220mA, DC Resistance (DCR)=300mR, Manufacturer=Murata, Manufacturer Part Number=LQP15MN2N0B02D, Max Operating Temperature=85°C, Min Operating Temperature=-40°C, Package Quantity=10000, Resistor Type="Thin Film", Self Resonant Frequency=6GHz, Test Frequency=500MHz, AMBIQ PN=LQP15MN2N0B02D, Case/Package=0402, Category="Fixed Inductors", ComponentLink1Description=https://datasheet.ciiva.com/11798/0900766b810228cf-11798602.pdf?src-supplier=RSComponents, ComponentLink1URL=https://datasheet.ciiva.com/11798/0900766b810228cf-11798602.pdf?src-supplier=RSComponents, ComponentLink2Description=https://datasheet.ciiva.com/6705/l0075s0084lqp15m-6705214.pdf?src-supplier=Digi-Key, ComponentLink2URL=https://datasheet.ciiva.com/6705/l0075s0084lqp15m-6705214.pdf?src-supplier=Digi-Key, ComponentLink3Description=https://datasheet.ciiva.com/6705/l0075s0084lqp15m-6705210.pdf?src-supplier=Digi-Key, ComponentLink3URL=https://datasheet.ciiva.com/6705/l0075s0084lqp15m-6705210.pdf?src-supplier=Digi-Key, ComponentLink4Description=https://datasheet.ciiva.com/4977/product-4977814.pdf?src-supplier=Mouser, ComponentLink4URL=https://datasheet.ciiva.com/4977/product-4977814.pdf?src-supplier=Mouser, ComponentLink5Description=https://datasheet.ciiva.com/8510/l0075s0084lqp15m-8510303.pdf?src-supplier=Avnet, ComponentLink5URL=https://datasheet.ciiva.com/8510/l0075s0084lqp15m-8510303.pdf?src-supplier=Avnet, ComponentLink6Description=https://datasheet.ciiva.com/16397/l0075s0084lqp15m-16397565.pdf?src-supplier=Future+Electronics, ComponentLink6URL=https://datasheet.ciiva.com/16397/l0075s0084lqp15m-16397565.pdf?src-supplier=Future+Electronics, Core Material=Non-Magnetic, DC Current=220mA, Depth=0.6mm, Height=0.35mm, Height - Seated (Max)=0.018inch, Inductance=2nH, Lead Free="Lead Free", Length=1mm, Max DC Current=220mA, Military Standard=Not, Mount="Surface Mount", Packaging="Tape and Reel", Pricing 1="1=0.18190, 10=0.16280, 25=0.16100, 100=0.10650, 250=0.10520, 500=0.08710, 1000=0.07690, 3000=0.05610, 6000=0.05560 (USD)", Q Factor=13, Radiation Hardening=No, Rated Current-Max=220mA, REACH SVHC="No SVHC", RoHS=Yes, RoHS Compliant=Yes, Series=LQP15M, Shielding=Unshielded, Stock 1=9090, Supplier 1="Arrow Electronics", Supplier Part Number 1=LQP15MN2N0B02D, Technology="THIN FILM", Termination=SMD/SMT, Width=0.02inch
R4: library part Resistor, "CRCW Series 0402 0.2 W 0 Ohm Jumper Surface Mount Thick Film Chip Resistor", Case Code (Imperial)=0402, Case Code (Metric)=1005, Manufacturer="Vishay Dale", Manufacturer Part Number=CRCW04020000Z0EDHP, Max Operating Temperature=155°C, Max Power Dissipation=125mW, Min Operating Temperature=-55°C, Package Quantity=1, Power Rating=200mW, Resistance=0R, Resistor Type="Thick Film", Supplier Part Number 1=68R2982, Temperature Coefficient=0ppm/°C, Voltage Rating=50V, AMBIQ PN=CRCW04020000Z0EDHP, Case/Package=0402, Category="Chip SMD Resistors", ComponentLink1Description=https://datasheet.ciiva.com/7725/crcwhpe3-7725758.pdf?src-supplier=Element14, ComponentLink1URL=https://datasheet.ciiva.com/7725/crcwhpe3-7725758.pdf?src-supplier=Element14, ComponentLink2Description=https://datasheet.ciiva.com/28621/1912814-28621324.pdf?src-supplier=Element14, ComponentLink2URL=https://datasheet.ciiva.com/28621/1912814-28621324.pdf?src-supplier=Element14, ComponentLink3URL=https://datasheet.ciiva.com/2470/crcwhpe3-2470556.pdf?src-supplier=Digi-Key, Construction=Rectangular, Contact Plating=Tin, Depth=0.5mm, Features="Automotive AEC-Q200", Height=0.3mm, Lead Free="Lead Free", Length=1mm, Military Standard=Not, Mount="Surface Mount", Number of Terminations=2, Packaging="Tape and Reel", Pricing 1="1=0.01500, 10000=0.01500 (USD)", Radiation Hardening=No, REACH SVHC=Unknown, RoHS=Yes, RoHS Compliant=Yes, Series=CRCW-HP, Size Code=0402, Stock 1=60000, Supplier 1=Newark, Technology="THICK FILM", Termination=SMD/SMT, Voltage Rating (DC)=50V, Weight=2.3E-05oz, Width=0.02inch
R7: library part Resistor, "RES SMD 100K OHM 1% 1/10W 0402", Case Code (Imperial)=0402, Case Code (Metric)=1005, Manufacturer=Panasonic, Manufacturer Part Number=ERJ-2RKF1003X, Max Operating Temperature=155°C, Max Power Dissipation=100mW, Min Operating Temperature=-55°C, Package Quantity=10000, Resistance=100kR, Resistor Type="Thick Film", Temperature Coefficient=100ppm/°C, Tolerance=1%, Voltage Rating=50V, AMBIQ PN=ERJ-2RKF1003X, Case/Package=0402, Category="Chip SMD Resistors", ComponentLink1Description=https://datasheet.ciiva.com/34303/1987038-34303550.pdf?src-supplier=Jameco, ComponentLink1URL=https://datasheet.ciiva.com/34303/1987038-34303550.pdf?src-supplier=Jameco, ComponentLink2Description=https://datasheet.ciiva.com/11821/0900766b80f80784-11821175.pdf?src-supplier=RSComponents, ComponentLink2URL=https://datasheet.ciiva.com/11821/0900766b80f80784-11821175.pdf?src-supplier=RSComponents, ComponentLink3URL=https://datasheet.ciiva.com/7830/aoa0000ce2-7830725.pdf?src-supplier=Element14, Contact Plating=Tin, Depth=0.5mm, Features="Automotive AEC-Q200", Height=0.35mm, Lead Free="Lead Free", Length=1mm, Military Standard=Not, Mount="Surface Mount", Number of Pins=2, Number of Terminations=2, Packaging="Cut Tape", Power Rating=100mW, Pricing 1="10000=0.00840 (USD)", Radiation Hardening=No, REACH SVHC="No SVHC", RoHS=Yes, RoHS Compliant=Yes, Series=ERJ-2Rx, Stock 1=267708, Supplier 1="Arrow Electronics", Supplier Part Number 1=ERJ-2RKF1003X, Technology="THICK FILM", Termination=SMD/SMT, Voltage Rating (DC)=50V, Weight=0.000388oz, Width=0.5mm
S1: "Switch (2-Pin Push)", Manufacturer_Name="Shou Han", Datasheet Link=https://datasheet.lcsc.com/szlcsc/1904241742_SHOU-HAN-TS2306A-240gf-MSM-9_C388290.pdf, Height=1mm, Manufacturer_Part_Number=TS2306A-240GF-MSM-9_C388290
TP1 TP2 TP3 TP4: library part TP_PAD, "None", AMBIQ PN=TP_PAD
U1: "SOCKET, SIP, FALCON"
U2: library part APOLLO4B_OUT, "None", AMBIQ PN=APOLLO4P, Category=Microcontrollers
Y1: library part 2x2_Crystal, "NONE", Case/Package=SMD/SMT, ESR (Equivalent Series Resistance)=100R, Frequency Stability=20ppm, Frequency Tolerance=10ppm, Load Capacitance=6pF, Manufacturer=Abracon, Manufacturer Part Number=ABM12W-32.0000MHZ-6-D1X-T3, Max Operating Temperature=85°C, Min Operating Temperature=-40°C, Supplier Part Number 1=815-12W32-6D1XT, AMBIQ PN=ABM12W-32.0000MHZ-6-D1X-T3, Category=Crystals, ComponentLink1Description=https://abracon.com/Resonators/ABM12W.pdf?src-supplier=Digi-Key, ComponentLink1URL=https://abracon.com/Resonators/ABM12W.pdf?src-supplier=Digi-Key, Frequency=32MHz, Mount="Surface Mount", Packaging="Tape and Reel", Pricing 1="1=0.99000, 10=0.88400, 50=0.88400, 100=0.73000, 1000=0.57600, 10000=0.53700 (USD)", RoHS=Yes, RoHS Compliant=Yes, Stock 1=2341, Supplier 1=Mouser
Y2: library part 1x1_Crystal, "NONE", Case/Package=SMD/SMT, ESR (Equivalent Series Resistance)=90kR, Frequency Tolerance=20ppm, Load Capacitance=7pF, Manufacturer=TXC, Manufacturer Part Number=9HT12-32.768KDZY-T, Max Operating Temperature=85°C, Min Operating Temperature=-40°C, Supplier Part Number 1=45AC5777, AMBIQ PN=9HT12-32.768KDZY-T, Category=Crystals, ComponentLink1Description=http://www.txccrystal.com/images/pdf/number-crystal-khz.pdf?src-supplier=Digi-Key, ComponentLink1URL=http://www.txccrystal.com/images/pdf/number-crystal-khz.pdf?src-supplier=Digi-Key, ComponentLink2Description=http://www.txccrystal.com/images/pdf/9ht12.pdf?src-supplier=Digi-Key, ComponentLink2URL=http://www.txccrystal.com/images/pdf/9ht12.pdf?src-supplier=Digi-Key, Frequency=32.768kHz, Height=0.02inch, Lead Free="Lead Free", Length=0.063inch, Mount="Surface Mount", Packaging="Tape and Reel", Pricing 1="1=1.39000, 10=1.33000, 25=1.26000, 50=1.19000, 100=1.12000 (USD)", RoHS=Yes, Stock 1=2496, Supplier 1=Newark, Width=0.039inch

## Via types
v1: diameter 0.254, hole 0.152, TOP to BOTTOM, tented both sides, 84 vias
v2: diameter 0.203, hole 0.102, TOP to BOTTOM, tented both sides, 84 vias
v3: diameter 0.203, hole 0.102, TOP to LY2 - GND, tented both sides, 40 vias
v4: diameter 0.203, hole 0.102, TOP to LY3 - GND, tented both sides, 28 vias

## Nets (pads, with @x,y where several pads share a name; then routed paths per layer and width w, separated by ;. In a path a pad name is that pad's centre, name@x,y a point inside that pad or via, vN(x,y) a via of type N, cw(c..) or ccw(c..) an arc to the next point about the centre after c; other vN are vias at no path point)
ADC0_CTS23_I2S1DIN_GP19: U1.C3 U2.24 | length 7.9
  LY3 - GND w0.102: v4(9.732,11) cw(c10.025,10.915) 9.809,11.13 10.632,11.953 cw(c10.847,11.736) 10.706,12.007 cw(c10.847,11.736) 10.847,12.041 10.969,12.041 cw(c10.968,11.736) 11.223,11.903 cw(c10.834,11.65) 11.298,11.652 11.298,11.414 11.298,11.397 ccw(c11.603,11.397) 11.388,11.181 11.641,10.928 13.975,8.594 ccw(c14.189,8.811) 14.187,8.506 v1(14.994,8.506)
  BOTTOM w0.254: v1(14.994,8.506) 15.494,8.506 U2.24@15.5,8.5
ADC1_I2S1WS_CTS01_GP18: U1.D3 U2.23 | length 7.3
  LY3 - GND w0.102: v4(9.485,11.247) ccw(c9.322,11.505) 9.536,11.288 10.429,12.181 cw(c10.644,11.965) 10.486,12.226 cw(c10.644,11.965) 10.644,12.27 11.15,12.27 cw(c11.147,11.863) 11.154,12.27 cw(c11.147,11.863) 11.553,11.865 11.553,11.515 ccw(c11.858,11.517) 11.641,11.303 13.85,9.094 ccw(c14.064,9.311) 14.062,9.006 v1(14.2,9.006)
  BOTTOM w0.254: v1(14.2,9.006) 14.694,9.006 U2.23@14.7,9
ADC2_I2S1DAT_RTS3_I2S1DOUT_GP17: U1.D4 U2.30 | length 10.3
  BOTTOM w0.102: v2@9.244,10.993 11.641,10.993 cw(c11.641,10.693) 11.699,10.987 cw(c11.641,10.693) 11.853,10.905 13.628,9.129 cw(c13.416,8.917) 13.716,8.919 ; 13.716,8.917 13.716,6.028 ccw(c14.021,6.028) 13.805,5.814 14.024,5.594 ccw(c14.239,5.811) 14.237,5.506 14.994,5.506 14.997,5.503 15.497,5.503 U2.30@15.5,5.5
  other v2: 9.237,11
ADC3_I2S1CK_RTS1_GP16: U1.D7 U2.36 | length 12.6
  BOTTOM w0.102: v2(8.495,10.258) 10.249,10.258 cw(c10.249,9.991) 10.437,10.18 10.665,9.952 12.707,7.91 cw(c12.518,7.722) 12.785,7.722 12.785,3.855 ccw(c13.09,3.855) 12.874,3.64 13.937,2.577 ccw(c14.151,2.794) 14.15,2.489 14.994,2.489 15.489,2.489 U2.36@15.5,2.5
ADC4_RX3_REFCLK_GP15: TP4.TP U1.E5 | length 0.9
  BOTTOM w0.152: TP4.TP@8.051,11.624 cw(c7.985,11.327) 8.2,11.542 v2(8.742,11)
ADC5_RX1_I2S0DIN_GP14: U1.D6 U2.34 | length 11.9
  BOTTOM w0.102: v2(8.742,10.505) 10.422,10.505 cw(c10.422,10.2) 10.639,10.415 10.883,10.171 13.023,8.031 cw(c12.807,7.815) 13.112,7.816 ; 13.112,7.815 13.112,4.18 ccw(c13.417,4.18) 13.201,3.965 13.571,3.595 ccw(c13.785,3.811) 13.784,3.506 14.994,3.506 14.997,3.503 15.497,3.503 U2.34@15.5,3.5
ADC6_I2S0WS_TX23_GP13: U1.D5 U2.32 | length 11.4
  BOTTOM w0.102: v2(8.99,10.753) ccw(c9.058,11.05) 9.057,10.745 11.454,10.745 cw(c11.454,10.44) 11.457,10.745 cw(c11.454,10.44) 11.669,10.655 13.322,9.003 cw(c13.106,8.788) 13.411,8.789 ; 13.411,8.788 13.411,5.063 ccw(c13.716,5.063) 13.5,4.849 13.754,4.594 ccw(c13.968,4.811) 13.967,4.506 14.994,4.506 14.997,4.503 15.497,4.503 U2.32@15.5,4.5
ADC7_I2S0DAT_TX01_CMRF2_I2S0DOUT_GP12: U1.B4 U2.25 | length 6.1
  LY2 - GND w0.102: v3(9.732,10.505) ccw(c9.83,10.753) 9.828,10.487 11.199,10.487 11.902,10.487 cw(c11.902,10.182) 12.116,10.399 13.297,9.218 cw(c13.081,9.003) 13.386,9.004 ; 13.386,9.003 13.386,8.945 ccw(c13.691,8.946) 13.474,8.732 v1(14.2,8.006)
  BOTTOM w0.254: v1(14.2,8.006) 14.203,8.003 14.697,8.003 U2.25@14.7,8
AP4_USB_N: U1.M8 U2.98 | length 7.9
  TOP w0.102: v1(1,16.5) 2.223,16.5 cw(c2.223,16.195) 2.438,16.411 2.513,16.337 ; 2.513,16.336 5.961,12.889 6.057,12.793 6.138,12.711 6.143,12.706 cw(c5.928,12.49) 6.229,12.441 ccw(c7.14,12.288) U1.M8@6.265,11.992
  BOTTOM w0.254: U2.98@0.5,16.5 v1(1,16.5)
AP4_USB_P: U1.M7 U2.100 | length 8.9
  TOP w0.102: v1(1,17.5) 2.322,17.5 cw(c2.322,17.195) 2.537,17.411 6.351,13.597 6.426,13.522 cw(c6.21,13.307) 6.515,13.307 6.515,13.088 U1.M7@6.515,12.237
  BOTTOM w0.254: U2.100@0.5,17.5 v1(1,17.5)
CMIN0_M1MISO_TE_GP10: TP3.TP U1.E6 | length 0.4
  BOTTOM w0.152: TP3.TP@8.204,11.038 8.207,11.038 8.493,10.753 v2(8.495,10.753)
CMIN1_I2S0CK_RX23_GP11: U1.E4 U2.9 | length 7.9
  BOTTOM w0.102: v2(8.99,11.247) 9.597,11.854 ccw(c9.381,12.07) 9.686,12.07 9.686,12.316 cw(c9.991,12.315) 9.774,12.529 9.775,12.53 9.979,12.734 10.755,13.51 13.157,15.912 cw(c13.372,15.695) 13.37,16 ; 13.372,16 U2.9@14.7,16
CMRF0_M1SDA_M1MOSI_GP9: TP2.TP U1.E7 | length 0.8
  BOTTOM w0.152: TP2.TP@7.666,11.109 7.666,11.098 8.247,10.516 v2(8.247,10.505)
CMRF1_M1SCL_M1SCK_GP8: TP1.TP U1.E8 | length 0.4
  BOTTOM w0.152: TP1.TP@7.752,10.573 7.752,10.533 7.99,10.295 7.99,10.267 v2(8,10.258)
CTS01_GP59: U1.J8 U2.56 | length 13.6
  BOTTOM w0.102: 5.645,11.791 ccw(c5.647,11.486) 5.432,11.703 5.269,11.54 ccw(c5.485,11.325) 5.181,11.327 5.181,7.891 ccw(c5.485,7.892) 5.269,7.677 6.322,6.625 cw(c6.106,6.409) 6.411,6.409 6.411,2.382 ccw(c6.716,2.382) 6.432,2.27 6.479,2.152 cw(c6.195,2.04) 6.5,2.042 ; 5.647,11.791 6.34,11.791 cw(c6.34,11.486) 6.555,11.703 v2@7.009,11.248 ; U2.56@6.5,0.5 6.5,2.04
  other v2: 7.01,11.247
DISPCM_GP89: U1.F10 U2.62 | length 11
  LY3 - GND w0.102: v1(3.494,1) 3.494,1.84 cw(c3.8,1.839) 3.584,2.056 7.169,5.64 ccw(c6.952,5.856) 7.258,5.856 7.258,8.17 v4(7.258,10.01)
  BOTTOM w0.254: v1(3.494,1) 3.497,0.997 3.497,0.503 U2.62@3.5,0.5
GND: C1.2 C4.2 C5.2 C6.2 C7.2 C8.2 C9.2 C10.2 C11.2 C13.2 C14.2 C15.2 C16.2 C17.2 C18.2 C19.2 C20.2 C21.2 C22.2 C23.2 C24.2 C25.2 C26.2 C27.2 C42.2 D1.2 S1.2 U1.B2 U1.B5 U1.B12 U1.D2 U1.E12 U1.H1 U1.J10 U1.L1 U1.L2 U1.L8 U1.M1 U1.M3 U2.38 U2.39 U2.67 U2.68 U2.83 U2.85 U2.87 U2.89 U2.91 U2.93 U2.97 U2.99 Y1.2 Y1.4 | length 35.1
  TOP w0.1: v1(1.8,9) 1.806,9.006 3.38,9.006 C6.2@3.392,8.994 ; C4.2@7.638,17.236 C4.2@7.66,17.236 ; C20.2@9.441,14.833 9.43,14.891 v2(9.627,15.088) ; v2(10.135,7.29) 10.135,7.293 9.88,7.548 C18.2@9.88,7.551 C23.2@10.268,7.94 10.301,7.792 10.358,7.85 cw(c10.188,7.661) 10.366,7.841 11,7.208 ccw(c11.212,7.42) 11.317,7.139 ccw(c11.107,7.7) 11.529,7.275 11.988,7.734 C11.2@12.496,8.242 12.495,8.357 ccw(c12.303,8.587) 12.546,8.763 12.311,9.088 cw(c12.556,9.262) 12.263,9.198 v2(12.172,9.612) ; C10.2@11.608,8.059 11.575,7.912 11.663,7.999 cw(c11.513,7.795) 11.692,7.975 11.96,7.706
  TOP w0.102: C17.2@5.459,8.234 v2(5.841,7.852) 4.253,6.264 ccw(c4.469,6.049) 4.164,6.05 4.164,4.436 cw(c3.859,4.436) 4.075,4.22 S1.2@3.316,3.462 3.652,3.126 7.012,3.126 D1.2@7.16,3.273 8.005,3.273 8.18,3.449 C9.2@8.18,3.842 ; C7.2@6.459,6.07 6.842,6.452 7.179,6.452 Y1.2@7.182,6.448 7.266,6.448 C8.2@7.852,5.863 7.892,5.863 8.091,5.664 8.339,5.664 C1.2@8.945,6.27 8.945,6.26 9.355,5.85 v2(9.355,5.84) ; v3(8,13.722) 8,14.222 cw(c8.3,14.222) 8.087,14.434 8.152,14.499 ccw(c7.94,14.71) 8.181,14.532 ccw(c7.94,14.71) 8.24,14.71 8.24,15.266 cw(c8.54,15.266) 8.241,15.29 C5.2@8.261,15.539 ; C26.2@10.631,13.564 v2(10.977,13.219) ; v2(11.913,12.675) v2(11.913,12.675) C13.2@11.693,12.452 C13.2@11.693,12.452 C42.2@12.383,11.761
  LY2 - GND w0.1: v3(9.485,10.258) ccw(c9.569,10.545) 9.568,10.245 11.414,10.245 cw(c11.414,9.945) 11.626,10.158 v2(12.172,9.612)
  BOTTOM w0.1: v1(15,1.5) U2.38@15.5,1.5
  BOTTOM w0.254: U2.68@0.5,1.5 v1(1,1.5) ; U2.83@1.3,9 v1(1.8,9) ; U2.85@1.3,10 v1(1.8,10) ; U2.87@1.3,11 v1(1.8,11) ; U2.89@1.3,12 v1(1.8,12) ; U2.91@1.3,13 v1(1.8,13) ; U2.93@1.3,14 v1(1.8,14) ; U2.97@1.3,16 v1(1.8,16) ; U2.99@1.3,17 v1(1.8,17)
  other v2: 3.728,12.755 4.309,13.414 6.934,14.91 6.635,15.209 6.29,15.535 5.991,15.834 8.839,15.85 7.798,15.951 8.509,16.104 5.692,16.133 7.554,16.215 5.393,16.432 7.829,16.491 5.094,16.731 8.105,16.766 4.795,17.03 8.38,17.041 6.516,17.203 4.496,17.329 6.879,17.37 8.661,17.374 6.247,17.472 4.197,17.628 7.155,17.645 8.386,17.649 5.977,17.742 7.43,17.92 8.111,17.924 5.708,18.011 4.013,18.085 5.131,18.161 7.835,18.2 4.75,18.491 3.886,18.51 3.886,18.9 4.623,18.906 3.886,19.289 4.623,19.296 3.886,19.679 4.623,19.685
  other v3: 7.753,8.525 10.227,11 9.732,11.495 6.515,11.742 8.99,12.732 7.505,13.227 8,13.227 8.247,13.475
  other v4: 6.515,10.753
LPADC_D0N_SE0: U1.A10 U2.49 | length 8.2
  TOP w0.102: U1.A10@8.495,8.773 8.495,7.783 8.495,7.77 ccw(c8.8,7.772) 8.583,7.557 8.584,7.556 10.145,5.995 cw(c9.929,5.78) 10.234,5.78 10.234,2.884 10.234,2.674 cw(c9.408,2.674) 10.052,2.156 ccw(c10.26,1.99) 9.994,1.991 v1(9.994,1.806)
  BOTTOM w0.254: v1(9.994,1.806) 9.994,1.306 U2.49@10,1.3
LPADC_D0P_SE1: U1.A11 U2.50 | length 8.9
  TOP w0.102: U1.A11@8.247,8.525 8.247,7.618 ccw(c8.552,7.619) 8.257,7.544 ccw(c8.552,7.619) 8.336,7.405 8.337,7.403 9.846,5.894 cw(c9.63,5.679) 9.935,5.679 9.935,2.817 cw(c9.63,2.816) 9.846,2.601 9.571,2.326 ccw(c9.76,2.138) 9.494,2.139 v1(9.494,1)
  BOTTOM w0.254: v1(9.494,1) 9.494,0.506 U2.50@9.5,0.5
LPADC_D1N_SE2: U1.C11 U2.71 | length 9.9
  LY2 - GND w0.102: v1(1.8,3) 3.22,3 ccw(c3.22,3.305) 3.435,3.088 7.367,7.021 ccw(c7.151,7.236) 7.455,7.235 7.455,8.612 cw(c7.722,8.612) 7.533,8.801 v3(7.753,9.02)
  BOTTOM w0.254: U2.71@1.3,3 v1(1.8,3)
LPADC_D1P_SE3: U1.D11 U2.72 | length 10.3
  LY2 - GND w0.102: v1(1,3.5) 3.206,3.5 ccw(c3.206,3.805) 3.421,3.589 7.101,7.269 ccw(c6.884,7.483) 7.189,7.483 7.189,8.238 7.189,8.826 cw(c7.494,8.826) 7.279,9.041 v3(7.505,9.268)
  BOTTOM w0.254: U2.72@0.5,3.5 v1(1,3.5)
LPMICBIAS: C23.1 U1.B10 | length 2.6
  LY2 - GND w0.102: v3(8.247,9.02) 9.732,9.02 9.889,9.02 cw(c9.887,8.715) 10.161,8.581 cw(c9.818,8.749) 10.088,8.479 v2(9.909,8.299)
M0MISO_I2S0WS_CTS23_GP7: U1.J6 U2.58 | length 14.9
  BOTTOM w0.102: U2.58@5.515,0.5 5.515,6.491 ccw(c5.248,6.491) 5.437,6.68 4.631,7.486 4.63,7.487 cw(c4.846,7.701) 4.541,7.701 4.541,11.513 cw(c4.846,11.512) 4.63,11.727 5.038,12.135 cw(c5.254,11.92) 5.254,12.225 5.652,12.225 cw(c5.667,11.92) 5.666,12.225 6.896,12.225 cw(c6.896,11.92) 7.112,12.136 v2(7.505,11.742)
M0SCL_M0SCK_I2S0CK_RTS23_GP5: U1.H4 U2.4 | length 10.3
  BOTTOM w0.102: v2(8.247,11.99) 8.681,12.424 ccw(c8.404,12.699) 8.783,12.606 cw(c9.079,12.533) 8.863,12.748 9.414,13.299 13.522,17.406 ccw(c13.305,17.621) 13.61,17.621 13.61,17.908 cw(c13.915,17.908) 13.7,18.123 13.996,18.42 cw(c14.211,18.204) 14.21,18.509 ; 14.211,18.509 15.492,18.509 U2.4@15.5,18.5
M0SDA_M0MOSI_I2S0DAT_CTS01_I2S0DOUT_GP6: U1.J5 U2.59 | length 14.7
  BOTTOM w0.102: 4.911,6.676 4.247,7.339 cw(c4.436,7.528) 4.169,7.528 4.169,11.464 cw(c4.474,11.463) 4.257,11.678 4.944,12.364 cw(c5.159,12.148) 5.159,12.453 7.163,12.453 cw(c7.163,12.148) 7.378,12.364 v2(7.753,11.99) ; 4.911,6.675 cw(c4.695,6.46) 5,6.46 U2.59@5,1.3
M2MISO_DSPTCK_I2S0DIN_GP27: U1.M5 U2.102 | length 9.4
  TOP w0.102: v1(1,18.5) 2.055,18.5 cw(c2.055,18.195) 2.271,18.41 6.911,13.77 cw(c6.695,13.554) 7,13.572 cw(c6.695,13.554) 7,13.554 7,12.808 ccw(c7.305,12.809) U1.M5@7.01,12.732
  BOTTOM w0.254: U2.102@0.5,18.5 v1(1,18.5)
M2SCL_M2SCK_DSPTMS_GP25: U1.K5 U2.69 | length 17.6
  LY3 - GND w0.102: v1(0.794,2.006) 1.187,2.006 ccw(c1.186,2.311) 1.411,2.104 cw(c2.383,1.217) 1.643,2.306 ccw(c1.471,2.558) 1.685,2.341 3.378,4.034 ccw(c3.163,4.249) 3.468,4.249 3.468,11.001 cw(c3.772,10.999) 3.556,11.214 4.812,12.47 ccw(c4.596,12.685) 4.901,12.685 ; 4.901,12.685 4.901,13.116 cw(c5.205,13.116) 4.99,13.332 5.448,13.79 cw(c5.826,13.414) 5.475,13.815 ccw(c5.273,14.044) 5.488,13.827 5.538,13.877 cw(c5.752,13.661) 5.752,13.966 6.29,13.966 cw(c6.29,13.661) 6.505,13.876 6.904,13.477 7.224,13.157 cw(c7.008,12.942) 7.313,12.942 7.313,12.555 ccw(c7.618,12.555) 7.403,12.34 v4(7.505,12.237)
  BOTTOM w0.254: v1(0.794,2.006) 1.294,2.006 U2.69@1.3,2
M2SDA_M2MOSI_DSPTCK_GP26: U1.L5 U2.105 | length 10.5
  LY2 - GND w0.102: v1(1.8,20) 2.14,20 cw(c2.14,19.733) 2.33,19.921 3.117,19.134 cw(c2.901,18.919) 3.206,18.919 3.206,17.537 ccw(c3.511,17.537) 3.295,17.322 6.714,13.903 cw(c6.525,13.715) 6.792,13.715 6.792,13.365 6.792,13.059 ccw(c7.059,13.061) 6.869,12.874 6.87,12.872 v3(7.258,12.485)
  BOTTOM w0.254: U2.105@1.3,20 v1(1.8,20)
M3MISO_CKO_RX2_TE_GP33: U1.G3 U2.20 | length 9.3
  LY3 - GND w0.102: v4(8.742,11.99) 10.474,13.721 cw(c10.69,13.505) 10.69,13.811 11.474,13.811 cw(c11.474,13.506) 11.677,13.733 cw(c11.411,13.27) 11.79,13.647 13.419,12.018 cw(c13.203,11.803) 13.507,11.824 cw(c12.99,11.693) 13.523,11.686 13.523,11.67 cw(c13.218,11.672) 13.523,11.668 13.523,11.142 ccw(c13.828,11.143) 13.611,10.929 13.946,10.594 ccw(c14.16,10.811) 14.159,10.506 v1(14.994,10.506)
  BOTTOM w0.254: v1(14.994,10.506) 14.997,10.503 15.497,10.503 U2.20@15.5,10.5
M3SCL_M3SCK_TX2_GP31: U1.H2 U2.12 | length 8
  LY2 - GND w0.102: v3@8.747,12.481 8.976,12.481 ccw(c8.976,12.785) 9.191,12.569 9.304,12.682 ccw(c9.088,12.897) 9.393,12.897 9.393,13.32 9.393,13.467 cw(c9.659,13.467) 9.471,13.656 10.208,14.393 cw(c10.424,14.178) 10.423,14.482 13.502,14.494 cw(c13.503,14.189) 13.629,14.467 13.73,14.421 ccw(c13.855,14.699) 13.855,14.394 14.117,14.394 ccw(c14.117,14.699) 14.25,14.425 14.343,14.47 cw(c14.475,14.195) 14.475,14.5 v1(15,14.5)
  BOTTOM w0.254: v1(15,14.5) U2.12@15.5,14.5
  other v3: 8.742,12.485
M3SDA_M3MOSI_RX0_GP32: U1.G2 U2.13 | length 7
  LY2 - GND w0.102: v3(8.99,12.237) 9.012,12.259 9.076,12.259 ccw(c9.076,12.526) 9.264,12.337 9.552,12.625 ccw(c9.335,12.839) 9.64,12.84 ccw(c-26.567,12.738) 9.639,13.074 ccw(c-26.567,12.738) 9.639,13.086 ccw(c-14.139,12.857) 9.634,13.365 cw(c9.939,13.37) 9.722,13.584 10.246,14.108 cw(c10.461,13.892) 10.46,14.196 ; 10.461,14.196 10.904,14.196 13.445,14.188 cw(c13.444,13.921) 13.633,14.109 13.662,14.08 ccw(c13.851,14.268) 13.85,14.001 v1(14.2,14)
  BOTTOM w0.254: v1(14.2,14) U2.13@14.7,14
M5MISO_I2S1WS_RTS01_GP49: U1.D1 U2.7 | length 7.9
  TOP w0.102: U1.D1@9.98,11.742 9.98,12.333 ccw(c9.407,12.333) 9.923,12.581 cw(c10.198,12.714) 9.893,12.712 9.893,12.819 9.893,13.112 ccw(c9.588,13.111) 9.891,13.147 cw(c10.1,13.172) 9.951,13.321 13.551,16.921 cw(c13.766,16.705) 13.773,17.01 v1(14.2,17)
  BOTTOM w0.102: v1(14.2,17) U2.7@14.7,17
M5SCL_M5SCK_I2S1CK_RX01_GP47: U1.F1 U2.3 | length 9.2
  TOP w0.102: U1.F1@9.485,12.237 9.485,12.496 ccw(c9.18,12.494) 9.484,12.52 cw(c9.661,12.537) 9.483,12.537 9.483,12.935 ccw(c9.178,12.935) 9.47,13.022 9.436,13.14 cw(c9.728,13.226) 9.423,13.226 9.423,13.289 9.423,13.385 cw(c9.728,13.385) 9.512,13.6 12.662,16.75 ccw(c12.446,16.965) 12.751,16.965 12.751,17.433 cw(c13.056,17.432) 12.839,17.646 v1@14.193,19
  BOTTOM w0.102: v1(14.2,19) U2.3@14.7,19
M5SDA_M5MOSI_I2S1DAT_RX23_I2S1DOUT_GP48: U1.E1 U2.5 | length 8.6